# Altium PCB PCB1.PcbDoc
Units mil, origin at the board's own origin, x right, y up, seen from the top; angles counter-clockwise.
Board outline 3780 x 2690 mil, 2 copper layers (Top Layer, Bottom Layer); 39 components, 38 nets, 155 pads, 0 vias.
Unrouted connection lines stored in the file: 6.
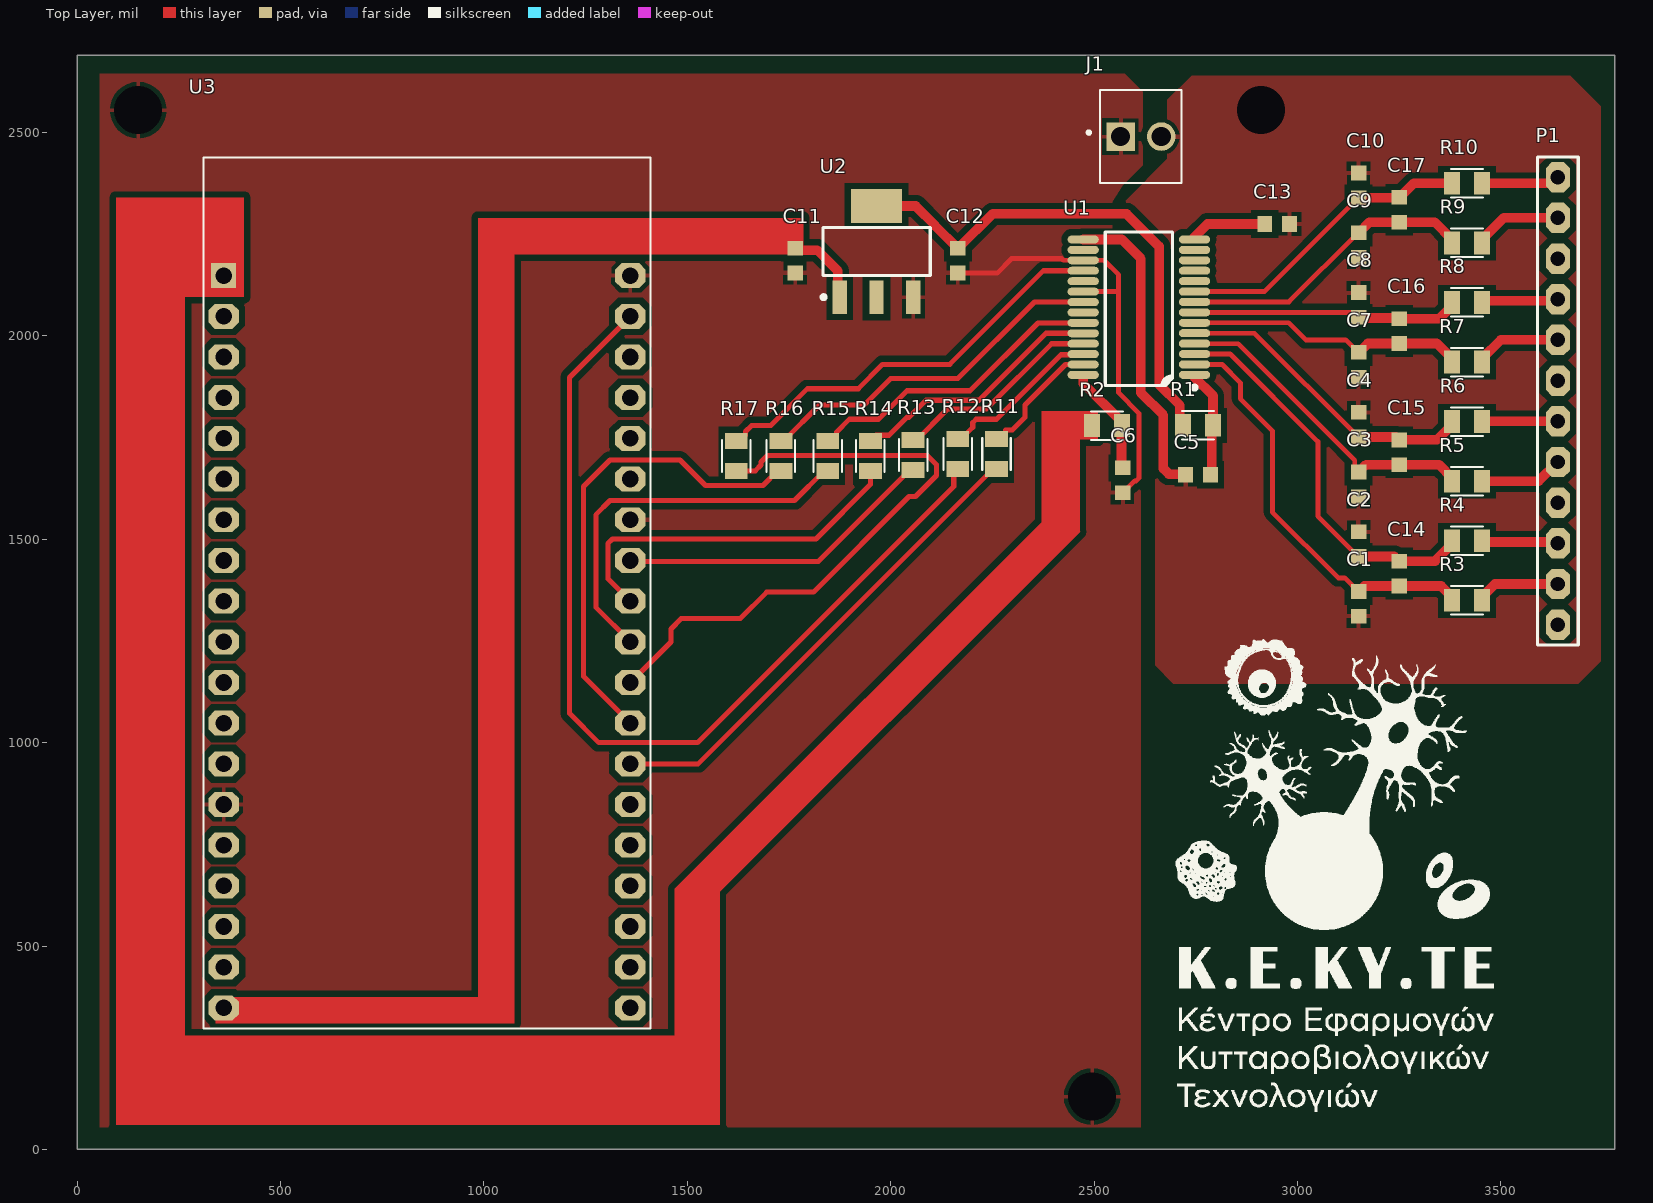
[diagram p0: Top Layer view]
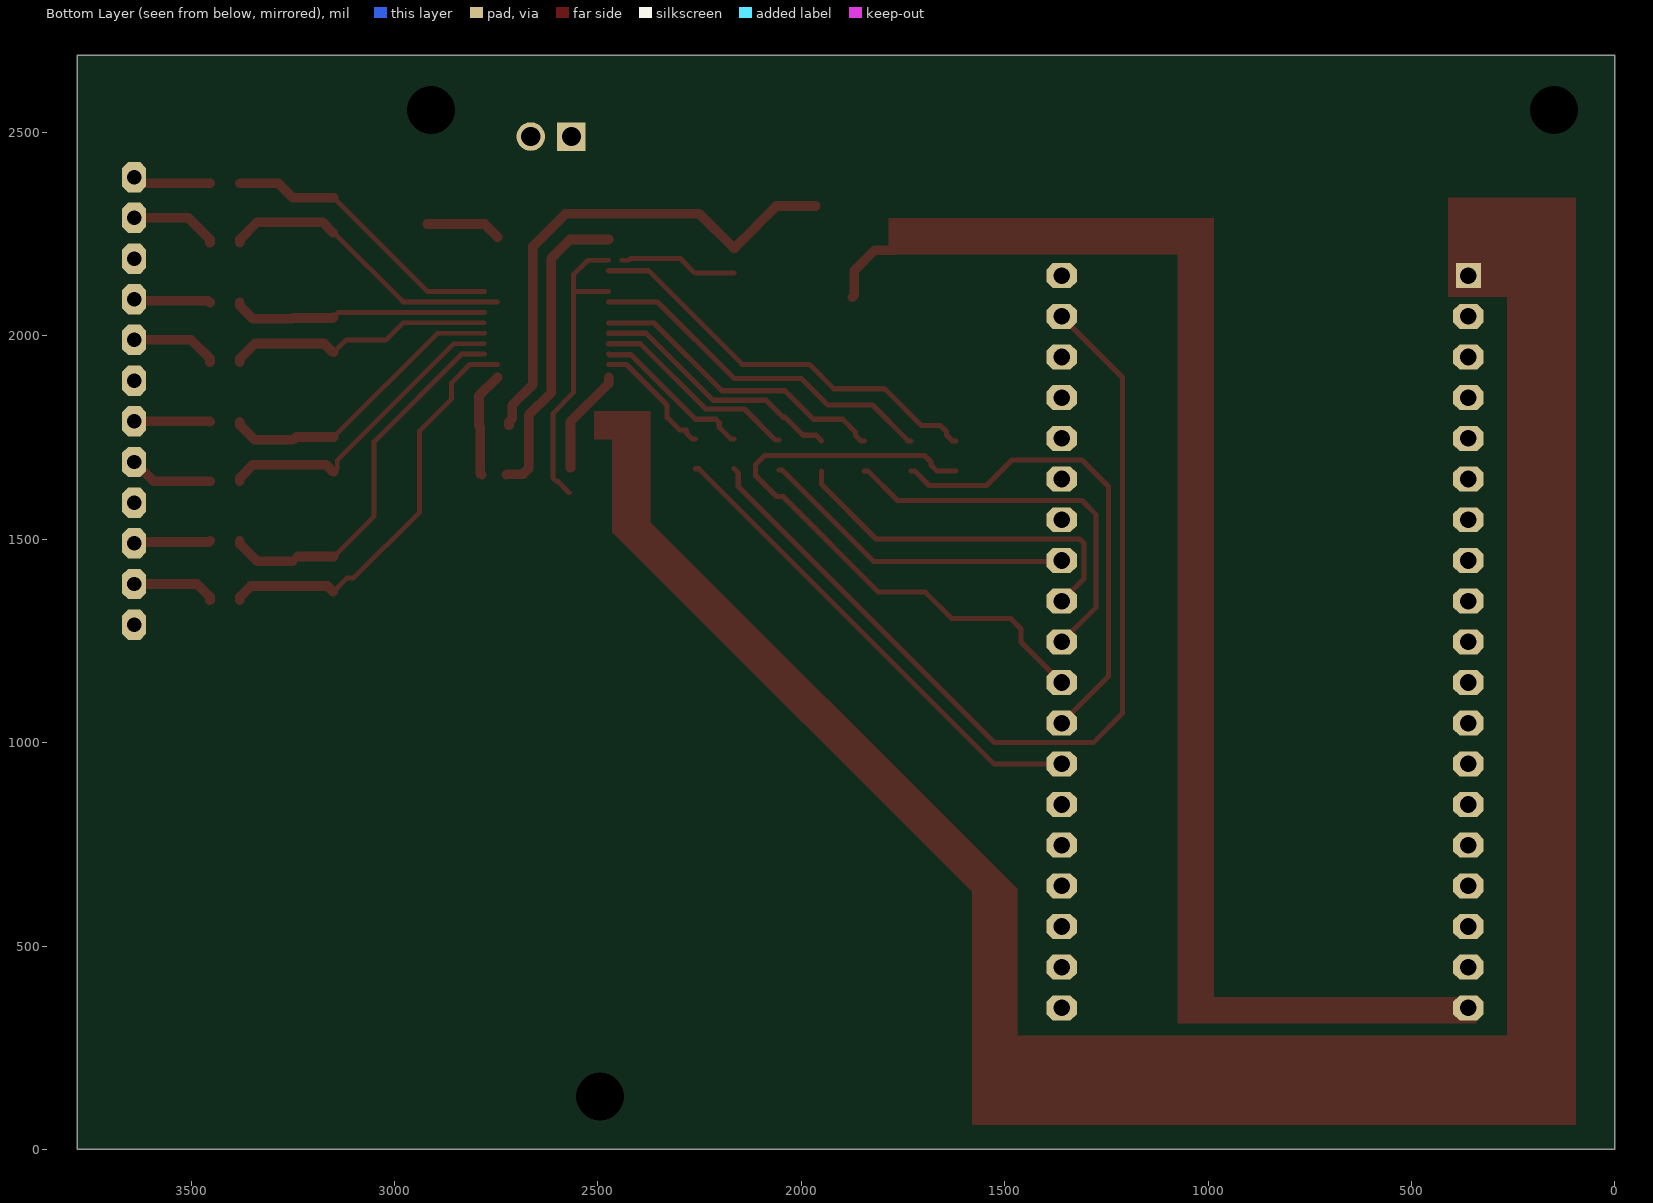
[diagram p1: Bottom Layer view, seen from below]
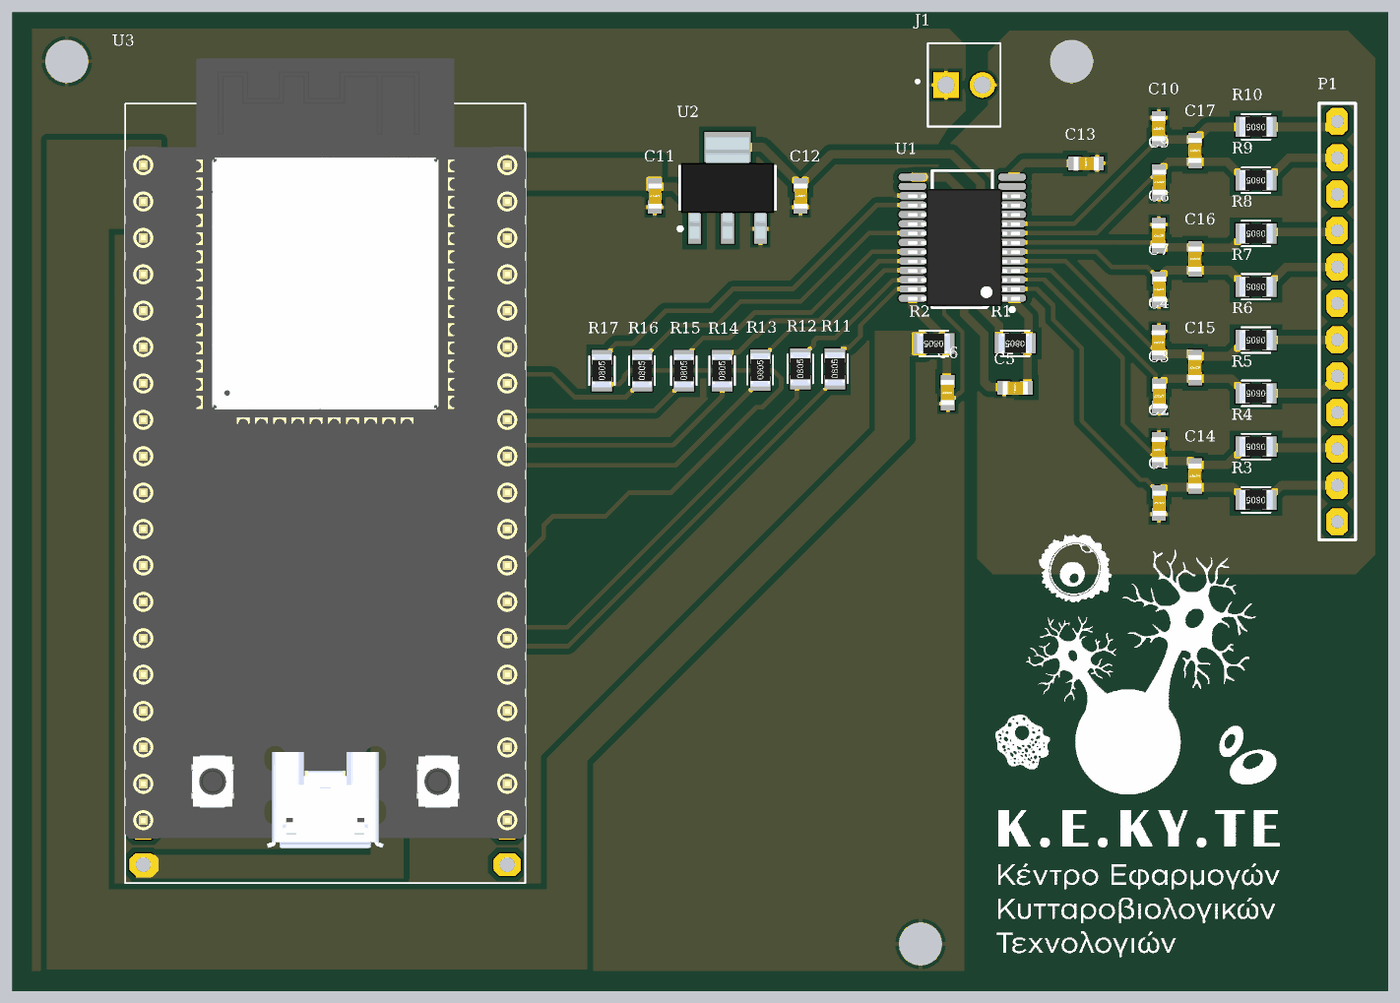
[diagram p2: 3D render of the assembled board from above, using the file's embedded part models]

## Layer stack, top to bottom
Top Solder: solder mask 0.4, Solder Resist, Dk 3.5
Top Layer: signal copper 1.4
Dielectric 1: dielectric 12.6, FR-4, Dk 4.8
Bottom Layer: signal copper 1.4
Bottom Solder: solder mask 0.4, Solder Resist, Dk 3.5

## Board outline
0,0 3780,0 3780,2690 0,2690

## Design rules (kind name [scope] priority, off if disabled: settings)
Clearance Clearance_2 [InNamedPolygon('GND_L01_P003')] p1: gap=15.75 ignorepadtopadclearanceinfootprint=FALSE except(0: Arc-Hole Track-Hole SMDPad-Hole THPad-Hole Via-Hole Fill-Hole Poly-Hole Region-Hole Text-Hole)
Clearance Clearance_1 [InNamedPolygon('AGND_L01_P004')] p2: gap=15.75 ignorepadtopadclearanceinfootprint=FALSE except(0: Arc-Hole Track-Hole SMDPad-Hole THPad-Hole Via-Hole Fill-Hole Poly-Hole Region-Hole Text-Hole)
Clearance wide [InNamedPolygon('AGND_L01_P000')] p3: gap=15.75 ignorepadtopadclearanceinfootprint=FALSE except(0: Arc-Hole Track-Hole SMDPad-Hole THPad-Hole Via-Hole Fill-Hole Poly-Hole Region-Hole Text-Hole)
Clearance [All] p4: gap=10 ignorepadtopadclearanceinfootprint=FALSE except(0: Arc-Hole Track-Hole SMDPad-Hole THPad-Hole Via-Hole Fill-Hole Poly-Hole Region-Hole Text-Hole)
PolygonConnect [All] p1: connectstyle=Relief reliefconductorwidth=10 reliefentries=4 polygonreliefangle="90 Angle" airgapwidth=10
RoutingVias [All] p1: holewidth=28 width=50 viastyle="Through Hole" minholewidth=28 minwidth=50 maxholewidth=28 maxwidth=50
SolderMaskExpansion [All] p1: expansion=4 istentingtop=FALSE
Width [All] p1: maxlimit=23.62 minlimit=3.94 preferedwidth=10 minimp=50.000000 maximp=50.000000 favimp=50.000000
30 further rules are at their usual default settings.

## Components (designator, comment, footprint, x,y, rotation, side; value= is the part's Value field where it differs from the comment)
C1 "100nF" CAP_0603 3150,1341.06 r270 top
C2 "100nF" CAP_0603 3150,1488.05 r90 top
C3 "100nF" CAP_0603 3150,1635.04 r270 top
C4 "100nF" CAP_0603 3150,1782.03 r90 top
C5 "100nF" CAP_0603 2755.29,1658.45 r180 top
C6 "100nF" CAP_0603 2570,1645 r90 top
C7 "100nF" CAP_0603 3150,1929.02 r270 top
C8 "100nF" CAP_0603 3150,2076.02 r90 top
C9 "100nF" CAP_0603 3150,2223.01 r270 top
C10 "100nF" CAP_0603 3150,2370 r90 top
C11 "10uF" CAP_0603 1765,2185 r270 top
C12 "10uF" CAP_0603 2165,2185 r270 top
C13 "100nF" CAP_0603 2950,2275 r180 top
C14 "100nF" CAP_0603 3250,1415.67 r90 top
C15 "100nF" CAP_0603 3250,1713.78 r90 top
C16 "100nF" CAP_0603 3250,2011.89 r90 top
C17 "100nF" CAP_0603 3250,2310 r90 top
J1 "GND_JUMPER" "CONN 2POS 2.54PITCH" 2615,2490 r180 top
P1 "ADC_CHANNELS" HDR1X12 3640,1290 r90 top
R1 "10" RES_0805 2755.29,1780 r180 top
R2 "10" RES_0805 2531.46,1779.57 r180 top
R3 "1K" RES_0805 3416.81,1350 r180 top
R4 "1K" RES_0805 3416.81,1496.43 r180 top
R5 "1K" RES_0805 3416.81,1642.86 r180 top
R6 "1K" RES_0805 3416.81,1789.29 r180 top
R7 "1K" RES_0805 3416.81,1935.71 r180 top
R8 "1K" RES_0805 3416.81,2082.14 r180 top
R9 "1K" RES_0805 3416.81,2228.57 r180 top
R10 "1K" RES_0805 3416.81,2375 r180 top
R11 "100" RES_0805 2260,1710 r90 top
R12 "10" RES_0805 2165,1710 r90 top
R13 "10" RES_0805 2055,1706.81 r90 top
R14 "10" RES_0805 1950,1705 r90 top
R15 "10" RES_0805 1845,1705 r90 top
R16 "10" RES_0805 1730,1705 r90 top
R17 "10" RES_0805 1620,1705 r90 top
U1 "MCP3912" "TI SSOP-24 DB" 2610,2045 r180 top
U2 "NCP1117ST33T3G" SOT223 1833,2050.2 r90 top
U3 "ESP32-DEVKITC-32D" MODULE_ESP32-DEVKITC-32D 860,1370 r0 top

## Footprints (in the part's own frame and the unit in brackets; to place one, negate y for a bottom-side part, rotate by r counter-clockwise, add the part's x,y. Pads: shape width x height; smd on the part's side, far side on the other; paste and mask are expansions set on the pad)
CAP_0603 [mm]
  rect 0.92x0.97 smd: 1(-0.775,0) 2(0.775,0)
  body extent -0.87,-0.44 0.87,0.51, height 0.87
"CONN 2POS 2.54PITCH" [mm]
  rect 1.785x1.785 hole 1.19: 1(1.27,0)
  round 1.785 hole 1.19: 2(-1.27,0)
  silkscreen extent -2.54,-2.9 3.35,2.9
HDR1X12 [mm] "Connector; Header; 12 Position"
  oct 1.9x1.5 hole 0.9: 1(0,0) 2(2.54,0) 3(5.08,0) 4(7.62,0) 5(10.16,0) 6(12.7,0) 7(15.24,0) 8(17.78,0) 9(20.32,0) 10(22.86,0) 11(25.4,0) 12(27.94,0)
  silkscreen extent -1.27,-1.27 29.21,1.27
MODULE_ESP32-DEVKITC-32D [mm]
  rect 1.56x1.56 hole 1.04: 1(-12.7,19.76)
  oct 1.9x1.56 hole 1.04: 2(-12.7,17.22) 3(-12.7,14.68) 4(-12.7,12.14) 5(-12.7,9.6) 6(-12.7,7.06) 7(-12.7,4.52) 8(-12.7,1.98) 9(-12.7,-0.56) 10(-12.7,-3.1) 11(-12.7,-5.64) 12(-12.7,-8.18) 13(-12.7,-10.72) 14(-12.7,-13.26) 15(-12.7,-15.8) 16(-12.7,-18.34) 17(-12.7,-20.88) 18(-12.7,-23.42) 19(-12.7,-25.96) 20(12.7,19.76) 21(12.7,17.22) 22(12.7,14.68) 23(12.7,12.14) 24(12.7,9.6) 25(12.7,7.06) 26(12.7,4.52) 27(12.7,1.98) 28(12.7,-0.56) 29(12.7,-3.1) 30(12.7,-5.64) 31(12.7,-8.18) 32(12.7,-10.72) 33(12.7,-13.26) 34(12.7,-15.8) 35(12.7,-18.34) 36(12.7,-20.88) 37(12.7,-23.42) 38(12.7,-25.96)
  silkscreen extent -13.95,-27.25 13.95,27.15, body extent -13.97,-24.8 13.97,30.3, height 8.25
RES_0805 [mm]
  rect 1x1.42 smd: 1(-0.935,0) 2(0.935,0)
  silkscreen extent -1,-0.89 1,0.89, body extent -1.15,-0.67 1.15,0.67, height 0.75
SOT223 [mm]
  rect 2.1x0.9 smd: 1(1.138,-1.053) 2(1.138,-3.353) 3(1.138,-5.653)
  rect 2.1x3.2 smd: 2(6.838,-3.353)
  silkscreen extent 1.01,-6.7 5.49,0.07, body extent 0.44,-6.6 7.53,-0.1, height 1.65
"TI SSOP-24 DB" [mm] "SSOP, 24-Leads, Body 8.20x5.30mm, Pitch 0.65mm, IPC Medium Density"
  oval 1.95x0.5 smd: 1(-3.475,3.575) 2(-3.475,2.925) 3(-3.475,2.275) 4(-3.475,1.625) 5(-3.475,0.975) 6(-3.475,0.325) 7(-3.475,-0.325) 8(-3.475,-0.975) 9(-3.475,-1.625) 10(-3.475,-2.275) 11(-3.475,-2.925) 12(-3.475,-3.575) 13(-3.475,-4.225) 14(-3.475,-4.875) 15(3.475,-4.875) 16(3.475,-4.225) 17(3.475,-3.575) 18(3.475,-2.925) 19(3.475,-2.269) 20(3.475,-1.619) 21(3.475,-0.969) 22(3.475,-0.319) 23(3.475,0.331) 24(3.475,0.981) 25(3.475,1.631) 26(3.475,2.281) 27(3.475,2.931) 28(3.475,3.581)
  silkscreen extent -3.6,-5.33 2.1,4.5, body extent -4.04,-4.06 3.78,4.14, height 1.97

## Part data
C1 C2 C3 C4 C5 C6 C7 C8 C9 C10 C11 C12 C13 C14 C15 C16 C17: library part "Cap 100nF 6V 603 Ceramic", "Cap 100nF 6V 603 Ceramic", Capacitance="0.1 uF", Capacitance - nF="100 nF", Capacitance - pF="100000 pF", Case Code - in=0603, Case Code - mm=1608, Case Height="0.8 mm", Case Length="1.6 mm", Dielectric=X7R, Manufacturer=KEMET, Manufacturer Part Number=C0603C104K9RACTU, Maximum Operating Temperature="+ 125 C", Minimum Operating Temperature="- 55 C", Operating Temperature Range="- 55 C to + 125 C", Package / Case="0603 (1608 metric)", Supplier Part Number 1=399-15351-1-ND, Temperature Coefficient / Code="+/- 15 %", Tolerance="10 %", Voltage Rating="6.3 V", Brand=Kemet, Case Width="0.8 mm", Class="Class 1", ComponentLink1Description=http://www.mouser.com/ds/2/212/KEM_C1002_X7R_SMD-1102033.pdf?src-supplier=Mouser, ComponentLink1URL=http://www.mouser.com/ds/2/212/KEM_C1002_X7R_SMD-1102033.pdf?src-supplier=Mouser, Dimensions="0.8 mm W x 1.6 mm L x 0.8 mm H", Dissipation Factor DF=5, Factory Pack Quantity=4000, Packaging=Reel, Part # Aliases=C0603C104K9RAC7867, Pricing 1="1=0.18, 10=0.126, 100=0.0594, 500=0.0417, 1000=0.0345 (USD)", Product="General Type MLCCs", Product Category="Multilayer Ceramic Capacitors MLCC - SMD/SMT", RoHS=Details, Series=C0603C, Stock 1=25357, Supplier 1=Digi-Key, Termination Style=SMD/SMT, Type="SMD MLCC X7R 6.3 - 250 VDC Commerical Grade", Voltage Rating DC="6.3 V"
J1: library part "CONN HEADER VERT 2POS 2.54MM", "Connector Header Through Hole 2 position 0.100\" (2.54mm)", Current Rating=4A, Manufacturer=Molex, Manufacturer Part Number=22-27-2021, Operating Temperature="0°C to +75°C", Supplier Part Number 1=WM4111-ND, Voltage Rating=250V, ComponentLink1Description=http://www.molex.com/webdocs/datasheets/pdf/en-us/0022272021_PCB_HEADERS.pdf?src-supplier=Avnet, ComponentLink1URL=http://www.molex.com/webdocs/datasheets/pdf/en-us/0022272021_PCB_HEADERS.pdf?src-supplier=Avnet, ComponentLink2Description=https://www.verical.com/server-webapp/html/getDatasheet?partID=163454&src-supplier=Verical, ComponentLink2URL=https://www.verical.com/server-webapp/html/getDatasheet?partID=163454&src-supplier=Verical, ComponentLink3Description=http://www.farnell.com/datasheets/2305438.pdf?src-supplier=Mouser, ComponentLink3URL=http://www.farnell.com/datasheets/2305438.pdf?src-supplier=Mouser, ComponentLink4Description=http://www.farnell.com/datasheets/2305438.pdf?src-supplier=Avnet+Europe, ComponentLink4URL=http://www.farnell.com/datasheets/2305438.pdf?src-supplier=Avnet+Europe, ComponentLink5Description=http://uk.rs-online.com/webdocs/13c2/0900766b813c2e6e.pdf?src-supplier=RSComponents, ComponentLink5URL=http://uk.rs-online.com/webdocs/13c2/0900766b813c2e6e.pdf?src-supplier=RSComponents, ComponentLink6Description=http://www.rapidonline.com/pdf/22-0838e.pdf?src-supplier=Rapid+Electronics, ComponentLink6URL=http://www.rapidonline.com/pdf/22-0838e.pdf?src-supplier=Rapid+Electronics, ComponentLink7Description=http://www.farnell.com/datasheets/2305438.pdf?src-supplier=Jameco, ComponentLink7URL=http://www.farnell.com/datasheets/2305438.pdf?src-supplier=Jameco, Contact Material="Tin plated brass", Housing material="Nylon (UL94V-0)", Pricing 1="1=0.27, 10=0.251, 100=0.1737, 500=0.147, 1000=0.1202, 5000=0.1069, 10000=0.0969 (USD)", Stock 1=0, Supplier 1=Digi-Key
P1: library part "Header 12", "Header, 12-Pin", LatestRevisionDate=17-Jul-2002, LatestRevisionNote="Re-released for DXP Platform.", Publisher="Altium Limited"
R1 R2 R3 R4 R5 R6 R7 R8 R9 R10 R11 R12 R13 R14 R15 R16 R17: library part "Res 1K 0805 5% 1/8W", "Res 1K 0805 5% 1/8W", Case Code - in=0805, Case Code - mm=2012, Manufacturer=Yageo, Manufacturer Part Number=RC0805JR-071KL, Operating Temperature Range="- 55 C to + 155 C", Power Rating="125 mW (1/8 W)", Resistance="1 kOhms", Supplier Part Number 1=311-1.0KARCT-ND, Temperature Coefficient="100 PPM / C", Tolerance="5 %", Voltage Rating="150 V", ComponentLink1Description=http://www.farnell.com/datasheets/2167052.pdf?src-supplier=Verical, ComponentLink1URL=http://www.farnell.com/datasheets/2167052.pdf?src-supplier=Verical, ComponentLink2Description=http://www.farnell.com/datasheets/2167052.pdf?src-supplier=Mouser, ComponentLink2URL=http://www.farnell.com/datasheets/2167052.pdf?src-supplier=Mouser, ComponentLink3Description=http://www.farnell.com/datasheets/2167052.pdf?src-supplier=Element14, ComponentLink3URL=http://www.farnell.com/datasheets/2167052.pdf?src-supplier=Element14, ComponentLink4Description=http://www.farnell.com/datasheets/444164.pdf?src-supplier=Element14, ComponentLink4URL=http://www.farnell.com/datasheets/444164.pdf?src-supplier=Element14, Packaging=Reel, Pricing 1="1=0.1, 10=0.035, 100=0.014, 1000=0.0063, 2500=0.0055 (USD)", Product="Thick Film Resistors General Purpose", Series=RC, Stock 1=5115220, Supplier 1=Digi-Key, Termination Style=SMD/SMT
U3: "EVAL BOARD FOR ESP-WROOM-32", Package=None, Availability=Warning, Check_prices=https://www.snapeda.com/parts/ESP32-DEVKITC-32D/Espressif%20Systems/view-part/2777395/?ref=eda, MF="Espressif Systems", MP=ESP32-DEVKITC-32D, Price=None, Purchase-URL=https://pricing.snapeda.com/search/part/ESP32-DEVKITC-32D/?ref=eda, SnapEDA_Link=https://www.snapeda.com/parts/ESP32-DEVKITC-32D/Espressif%20Systems/view-part/2777395/?ref=snap

## Free pads (board coordinates)
  round 60 hole 118.11: 2(150,2555) 2(2495,130) 2(2910,2555)

## Nets (pads, with @x,y where several pads share a name; then routed paths per layer and width w, separated by ;. In a path a pad name is that pad's centre, name@x,y a point inside that pad or via, vN(x,y) a via of type N, cw(c..) or ccw(c..) an arc to the next point about the centre after c; other vN are vias at no path point)
3V3A: C12.1 R1.2 U2.2 | length 1271
  Top Layer w23.62: U2.2@1965,2319.41 2061.1,2319.41 2109.41,2271.1 2109.41,2270.12 2164.02,2215.51 C12.1 2165.98,2215.51 2250.47,2300 2580,2300 2660,2220 2660,1880 2710.61,1829.39 2710.61,1796.14 2718.48,1788.27 R1.2
3V3D: R2.2 U3.1
5V: C11.1 U2.1 U3.19 | length 194.8
  Top Layer w23.62: C11.1 1770.04,2210.47 1819.53,2210.47 1870,2160 1870,2099.45 U2.1
AGND: C1.2 C2.2 C3.2 C4.2 C5.2 C7.2 C8.2 C9.2 C10.2 C13.1 J1.2 pad.2@2910,2555 U1.15 U1.16 | length 761.3
  Top Layer w23.62: U1.15 2568.07,2236.93 2615,2190 2615,1860 2670,1805 2670,1673.84 2683.84,1660 2723.24,1660 C5.2
CH0+: C1.1 C14.1 R3.2 U1.2 | length 1029.6
  Top Layer w11.81: U1.2 2814.31,1929.84 2859.58,1884.58 2859.58,1845.62 2938.43,1766.77 2938.43,1566.57 3100,1405 3115.59,1405 3149.02,1371.57 C1.1 C1.1@3150.98,1371.57
  Top Layer w23.62: C1.1@3150.98,1371.57 3164.58,1385.16 C14.1 3353.1,1385.16 3380,1358.27 R3.2
CH0-: C2.1 C14.2 R4.2 U1.3 | length 928.8
  Top Layer w11.81: U1.3@2778.2,1955.43 2834.57,1955.43 3050,1740 3050,1556.55 3149.02,1457.54 C2.1
  Top Layer w23.62: C2.1 C14.2@3237.66,1457.54 ; C14.2 3338.03,1446.19 3380,1488.16 R4.2
CH1+: C3.1 C15.1 R5.2 U1.4 | length 771.6
  Top Layer w11.81: U1.4@2779.37,1980.87 2854.13,1980.87 3140.54,1694.46 3140.54,1675.01 C3.1
  Top Layer w23.62: C3.1 3150.98,1665.55 3168.7,1683.27 C15.1 3347.85,1683.27 3380,1651.12 R5.2
CH1-: C4.1 C15.2 R6.2 U1.5 | length 733.9
  Top Layer w11.81: U1.5@2778.2,2006.61 2893.92,2006.61 3149.02,1751.52 C4.1
  Top Layer w23.62: C4.1 3241.79,1751.52 3249.02,1744.3 C15.2 3343.28,1744.3 3380,1781.02 R6.2
CH2+: C7.1 C16.1 R7.2 U1.6 | length 663.5
  Top Layer w11.81: U1.6@2779.37,2032.05 2977.95,2032.05 3020,1990 3118.55,1990 3149.02,1959.54 C7.1
  Top Layer w23.62: C7.1 3150.98,1959.54 3172.83,1981.38 C16.1 3342.6,1981.38 3380,1943.98 R7.2
CH2-: C8.1 C16.2 R8.2 U1.7 | length 629.5
  Top Layer w11.81: U1.7@2778.2,2057.8 2957.86,2057.8 2957.94,2057.71 3137.8,2057.71 C8.1
  Top Layer w23.62: C8.1 3151.55,2043.95 3248.45,2043.95 C16.2 3348.53,2042.4 3380,2073.87 R8.2
CH3+: C9.1 C17.1 R9.2 U1.8 | length 740.4
  Top Layer w11.81: U1.8 2978.88,2083.39 3149.02,2253.52 C9.1 C9.1@3150.98,2253.52
  Top Layer w23.62: C9.1@3150.98,2253.52 3176.95,2279.49 C17.1 3337.35,2279.49 3380,2236.84 R9.2
CH3-: C10.1 C17.2 R10.2 U1.9 | length 712
  Top Layer w11.81: U1.9@2778.2,2108.98 2918.5,2108.98 3149.02,2339.49 C10.1
  Top Layer w23.62: C10.1 3150.51,2340 3249.49,2340 C17.2 3250.98,2340.51 3285.47,2375 R10.2
CLKIN: R16.1 U3.31 | length 1182.5
  Top Layer w12.6: U3.31 1245,1162.95 1245,1630 1309.96,1694.96 1481.76,1694.96 1544.52,1632.2 1685.75,1632.2 1721.73,1668.19 R16.1
CS: R15.1 U3.29 | length 962.1
  Top Layer w12.6: U3.29 1275,1332.95 1275,1560 1309.96,1594.96 1763.5,1594.96 1836.73,1668.19 R15.1
DR: R17.1 U3.30 | length 1530.5
  Top Layer w12.6: U3.30 1459.67,1247.62 1459.67,1279.67 1485,1305 1630,1305 1695,1370 1810,1370 2045,1605 2060.69,1605 2112.63,1656.94 2112.63,1683.06 2089.7,1705.98 1984.86,1705.98 1984.7,1705.83 1696.95,1705.83 1681.07,1689.95 1681.07,1682.41 1666.85,1668.19 R17.1
GND: C6.1 C11.2 C12.2 J1.1 pad.2@150,2555 pad.2@2495,130 U1.17 U1.20 U2.3 U3.14 U3.20 U3.26 | length 1057.5
  Top Layer w11.81: C12.2 2261.34,2154.49 2296.85,2190 2420.16,2190 2424.41,2185.75 U1.17@2441.8,2185.75 ; U1.20 2558.74,2108.74 2560,2110 ; U1.17 2524.25,2185.75 2560,2150 2560,2110 ; C6.1 2570.98,1614.49 2599.89,1643.4 2603.08,1643.4 2610,1650.32 2610,1810 2560,1860 2560,2110
MISO: R13.1 U3.27 | length 789.4
  Top Layer w12.6: U3.27 1362.95,1445 1821.73,1445 2046.73,1670 R13.1
MOSI: R12.1 U3.21 | length 2321
  Top Layer w12.6: U3.21 1210,1897.95 1210,1072.38 1282.38,1000 1525,1000 2155,1630 2155,1663.19 R12.1
NetC5_1: C5.1 R1.1 U1.1 | length 261.1
  Top Layer w23.62: U1.1@2746.81,1898.19 2792.1,1852.9 R1.1 2788.95,1776.85 2788.95,1661.6 C5.1
NetC6_2: C6.2 R2.1 U1.28 | length 261.9
  Top Layer w23.62: U1.28@2473.19,1897.95 2473.19,1882.92 2568.27,1787.84 R2.1 2567.27,1778.57 C6.2@2567.27,1675.85
NetC13_2: C13.2 U1.14 | length 185.9
  Top Layer w23.62: U1.14@2746.81,2242.99 2778.82,2275 C13.2
NetP1_2: P1.2 R3.1 | length 207.8
  Top Layer w23.62: R3.1 3453.62,1358.27 3485.35,1390 P1.2
NetP1_3: P1.3 R4.1 | length 189
  Top Layer w23.62: R4.1 3456.84,1493.21 3636.79,1493.21 P1.3
NetP1_5: P1.5 R5.1 | length 205.9
  Top Layer w23.62: R5.1 3592.86,1642.86 P1.5
NetP1_6: P1.6 R6.1 | length 186.7
  Top Layer w23.62: R6.1 3453.98,1789.64 3639.64,1789.64 P1.6
NetP1_8: P1.8 R7.1 | length 213.7
  Top Layer w23.62: R7.1 3453.62,1943.98 3499.64,1990 P1.8
NetP1_9: P1.9 R8.1 | length 189.6
  Top Layer w23.62: R8.1 3457.55,2086.07 3636.07,2086.07 P1.9
NetP1_11: P1.11 R9.1 | length 216.7
  Top Layer w23.62: R9.1 3453.62,2236.84 3506.78,2290 P1.11
NetP1_12: P1.12 R10.1 | length 192.6
  Top Layer w23.62: R10.1 3615.41,2375 3630.41,2390 P1.12
NetR11_2: R11.2 U1.27 | length 311.3
  Top Layer w12.6: R11.2 2268.27,1746.81 2282.05,1760.59 2282.05,1768.86 2298.86,1768.86 2330,1800 2330,1830 2429.61,1929.61 U1.27
NetR12_2: R12.2 U1.26 | length 401.2
  Top Layer w12.6: R12.2 2173.27,1746.81 2201.65,1775.19 2201.65,1786.65 2210,1795 2260,1795 2418.69,1953.69 2471.68,1953.69 U1.26
NetR13_2: R13.2 U1.25 | length 516.4
  Top Layer w12.6: R13.2 2063.27,1743.62 2139.65,1820 2235,1820 2395.79,1980.79 U1.25
NetR14_2: R14.2 U1.24 | length 632.8
  Top Layer w12.6: R14.2 1954.13,1745.95 1963.78,1755.59 1995.67,1755.59 2040.08,1800 2045,1800 2086.81,1841.81 2216.81,1841.81 2381.38,2006.38 U1.24
NetR15_2: R15.2 U1.23 | length 753.2
  Top Layer w12.6: R15.2 1853.27,1741.81 1867.05,1755.59 1867.05,1763.86 1898.19,1795 1970,1795 2040,1865 2195,1865 2361.97,2031.97 U1.23
NetR16_2: R16.2 U1.21 | length 883.8
  Top Layer w12.6: R16.2 R16.2@1738.27,1741.81 ; R16.2@1738.41,1743.41 1825,1830 1935,1830 2000,1895 2165,1895 2353.15,2083.15 U1.21
NetR17_2: R17.2 U1.18 | length 1031.3
  Top Layer w12.6: R17.2 1628.27,1741.81 1643.03,1756.57 1643.03,1764.84 1658.11,1779.92 1704.92,1779.92 1795,1870 1920,1870 1980,1930 2145,1930 2375.16,2160.16 U1.18
RESET: R11.1 U3.32 | length 1200.4
  Top Layer w12.6: U3.32 1526.5,947.95 2251.73,1673.19 R11.1
SCK: R14.1 U3.28 | length 903.1
  Top Layer w12.6: U3.28 1305,1402.95 1305,1490 1315.94,1500.94 1815.94,1500.94 1950,1635 R14.1
pads on no net: P1.1 P1.4 P1.7 P1.10 U1.10 U1.11 U1.12 U1.13 U1.19 U1.22 U3.2 U3.3 U3.4 U3.5 U3.6 U3.7 U3.8 U3.9 U3.10 U3.11 U3.12 U3.13 U3.15 U3.16 U3.17 U3.18 U3.22 U3.23 U3.24 U3.25 U3.33 U3.34 U3.35 U3.36 U3.37 U3.38

## Polygon pours and split planes (outlines as drawn)
GND on Top Layer "GND_L01_P003" (solid, remove dead copper, pour order 3): 2620,2420 2570,2370 2545,2330 2545,1850 2580,1850 2615,1815 2615,55 55,55 55,2645 2575,2645 2620,2600
AGND on Top Layer "AGND_L01_P004" (solid, remove dead copper, pour order 4): 2740,2640 3670,2640 3745,2565 3745,1200 3690,1145 2695,1145 2650,1190 2650,1765 2645,1770 2645,1880 2565,1960 2565,2320 2680,2435 2680,2580
GND on Top Layer "GND_L01_P002" (solid, pour order 2): 2775,2650
AGND on Top Layer "AGND_L01_P000" (solid, pour order 0): 2195,2575

## Other copper
Top Layer:
  region net 5V: 1785,2200 1785,2290 985,2290 985,2200
  rectangle net 3V3D: 2370,1745 2510,1815
  rectangle net 3V3D: 1468.19,195 1580,640.61
  region net 3V3D: 1528.29,580.51 2466.39,1518.61 2406.29,1578.71 1468.19,640.61
  rectangle net 3V3D: 2370,1520 2465,1815
  rectangle net 3V3D: 95,60 1580,280
  rectangle net 3V3D: 95,195 265,2340
  rectangle net 3V3D: 170,2095 410,2340
  rectangle net 5V: 340,310 1075,375
  rectangle net 5V: 985,310 1075,2290

## Silkscreen, mask and mechanical layers (free items; w line width, h text height)
Top Overlay:
  drawing of 8795 lines, arcs and shapes, not listed
Mechanical 1:
  lines w23.62: 5,90 5,2595 65,2655 3675,2655 3735,2595 3735,90 3660,15 1185,15 ; 5,115 5,85 75,15 2580,15

## Dimensions
50,30 to 55,2640 on Mechanical 15
50,30 to 3780,0 on Mechanical 15